# Altium PCB PCB.PcbDoc (part 4 of 4)
Units mil, origin at the board's own origin, x right, y up, seen from the top; angles counter-clockwise.
Board outline 2958.79 x 990.23 mil, 2 copper layers (Component Side, Bottom Layer), stack 63.78 mil thick; 63 components, 40 nets, 198 pads, 73 vias.
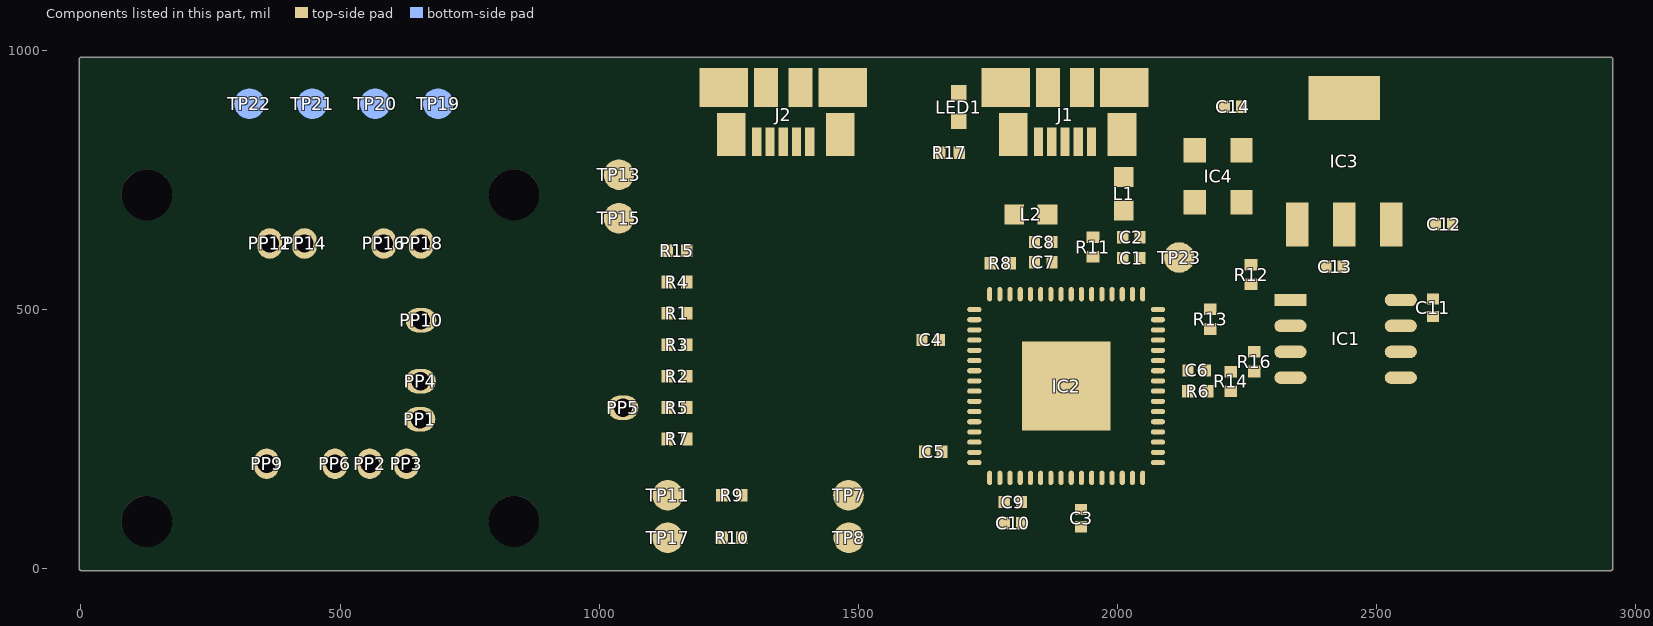
[diagram p4: the components of this part, seen from the top]

## Via types
v1: diameter 23.62, hole 9.84, Component Side to Bottom Layer, 73 vias

## Nets (pads, with @x,y where several pads share a name; then routed paths per layer and width w, separated by ;. In a path a pad name is that pad's centre, name@x,y a point inside that pad or via, vN(x,y) a via of type N, cw(c..) or ccw(c..) an arc to the next point about the centre after c; other vN are vias at no path point) (continued)
copper on no net: (continued)
  Component Side w0.3: 2876.75,760.69 2885.75,760.69 ; 2877.35,760.99 2885.15,760.99 ; 2877.65,761.29 2884.55,761.29 ; 2878.55,761.59 2883.95,761.59 ; 2879.45,761.89 2883.05,761.89 ; 2880.65,709.99 2885.15,709.99 ; 2880.65,710.29 2885.15,710.29 ; 2880.65,710.59 2885.15,710.59 ; 2880.65,710.89 2900.15,710.89 ; 2880.65,711.19 2900.15,711.19 ; 2880.65,711.49 2900.15,711.49 ; 2880.65,711.79 2900.15,711.79 ; 2880.65,712.09 2900.15,712.09 ; 2880.65,712.39 2899.85,712.39 ; 2880.65,712.69 2900.15,712.69 ; 2880.65,712.99 2900.15,712.99 ; 2880.65,713.29 2900.15,713.29 ; 2880.65,713.59 2900.15,713.59 ; 2880.65,713.89 2900.15,713.89 ; 2880.65,714.19 2900.15,714.19 ; 2880.65,714.49 2885.15,714.49 ; 2880.65,714.79 2885.15,714.79 ; 2880.95,708.19 2885.45,708.19 ; 2880.95,708.49 2885.45,708.49 ; 2880.95,708.79 2885.45,708.79 ; 2880.95,709.09 2885.45,709.09 ; 2880.95,709.39 2885.15,709.39 ; 2880.95,709.69 2885.15,709.69 ; 2880.95,715.09 2885.15,715.09 ; 2880.95,715.39 2885.15,715.39 ; 2880.95,715.69 2885.15,715.69 ; 2880.95,715.99 2885.45,715.99 ; 2880.95,716.29 2885.45,716.29 ; 2880.95,716.59 2885.45,716.59 ; 2880.95,757.39 2883.65,757.39 ; 2881.25,706.99 2886.05,706.99 ; 2881.25,707.29 2886.05,707.29 ; 2881.25,707.59 2885.75,707.59 ; 2881.25,707.89 2885.75,707.89 ; 2881.25,716.89 2885.45,716.89 ; 2881.25,717.19 2885.75,717.19 ; 2881.25,717.49 2885.75,717.49 ; 2881.25,717.79 2886.05,717.79 ; 2881.55,706.39 2886.65,706.39 ; 2881.55,706.69 2886.35,706.69 ; 2881.55,718.09 2886.05,718.09 ; 2881.55,718.39 2886.35,718.39 ; 2881.55,757.09 2883.35,757.09 ; 2881.85,705.79 2887.25,705.79 ; 2881.85,706.09 2886.95,706.09 ; 2881.85,718.69 2886.65,718.69 ; 2881.85,718.99 2886.95,718.99 ; 2882.15,705.19 2888.15,705.19 ; 2882.15,705.49 2887.55,705.49 ; 2882.15,719.29 2887.25,719.29 ; 2882.15,719.59 2887.85,719.59 ; 2882.15,756.79 2883.05,756.79 ; 2882.45,704.59 2898.95,704.59 ; 2882.45,704.89 2889.05,704.89 ; 2882.45,719.89 2888.45,719.89 ; 2882.45,720.19 2889.95,720.19 ; 2882.75,704.29 2899.25,704.29 ; 2882.75,720.49 2898.35,720.49 ; 2882.75,756.49 2883.05,756.49 ; 2883.05,703.69 2898.95,703.69 ; 2883.05,703.99 2899.25,703.99 ; 2883.05,720.79 2898.05,720.79 ; 2883.05,721.09 2897.75,721.09 ; 2883.35,703.39 2898.65,703.39 ; 2883.35,721.39 2897.45,721.39 ; 2883.65,703.09 2898.35,703.09 ; 2883.65,721.69 2897.15,721.69 ; 2883.95,702.79 2898.05,702.79 ; 2883.95,721.99 2896.85,721.99 ; 2884.25,702.49 2897.75,702.49 ; 2884.25,722.29 2896.55,722.29 ; 2884.55,722.59 2896.25,722.59 ; 2884.85,702.19 2897.15,702.19 ; 2884.85,722.89 2895.65,722.89 ; 2885.15,701.89 2896.85,701.89 ; 2885.45,723.19 2895.35,723.19 ; 2885.75,701.59 2896.25,701.59 ; 2885.75,749.89 2890.55,749.89 ; 2885.75,750.19 2890.55,750.19 ; 2886.05,723.49 2894.75,723.49 ; 2886.05,746.89 2890.85,746.89 ; 2886.05,747.19 2890.85,747.19 ; 2886.05,747.49 2890.85,747.49 ; 2886.05,747.79 2890.55,747.79 ; 2886.05,748.09 2890.55,748.09 ; 2886.05,748.39 2890.55,748.39 ; 2886.05,748.69 2890.55,748.69 ; 2886.05,748.99 2890.55,748.99 ; 2886.05,749.29 2890.55,749.29 ; 2886.05,749.59 2890.55,749.59 ; 2886.05,750.49 2890.55,750.49 ; 2886.05,750.79 2890.55,750.79 ; 2886.05,751.09 2890.55,751.09 ; 2886.05,751.39 2890.55,751.39 ; 2886.05,751.69 2890.55,751.69 ; 2886.05,751.99 2890.55,751.99 ; 2886.05,752.29 2890.55,752.29 ; 2886.05,752.59 2890.85,752.59 ; 2886.05,752.89 2890.85,752.89 ; 2886.05,753.19 2890.85,753.19 ; 2886.35,701.29 2895.65,701.29 ; 2886.35,745.69 2891.15,745.69 ; 2886.35,745.99 2891.15,745.99 ; 2886.35,746.29 2891.15,746.29 ; 2886.35,746.59 2890.85,746.59 ; 2886.35,753.49 2890.85,753.49 ; 2886.35,753.79 2891.15,753.79 ; 2886.35,754.09 2891.15,754.09 ; 2886.35,754.39 2891.15,754.39 ; 2886.65,723.79 2894.15,723.79 ; 2886.65,744.49 2892.05,744.49 ; 2886.65,744.79 2891.75,744.79 ; 2886.65,745.09 2891.45,745.09 ; 2886.65,745.39 2891.45,745.39 ; 2886.65,754.69 2891.45,754.69 ; 2886.65,754.99 2891.45,754.99 ; 2886.65,755.29 2891.75,755.29 ; 2886.95,700.99 2894.75,700.99 ; 2886.95,743.89 2892.65,743.89 ; 2886.95,744.19 2892.35,744.19 ; 2886.95,755.59 2892.05,755.59 ; 2886.95,755.89 2892.35,755.89 ; 2886.95,756.19 2892.65,756.19 ; 2887.25,743.29 2893.55,743.29 ; 2887.25,743.59 2892.95,743.59 ; 2887.25,756.49 2892.95,756.49 ; 2887.25,756.79 2893.55,756.79 ; 2887.55,724.09 2892.95,724.09 ; 2887.55,742.69 2895.05,742.69 ; 2887.55,742.99 2894.15,742.99 ; 2887.55,757.09 2894.15,757.09 ; 2887.55,757.39 2895.05,757.39 ; 2887.85,742.39 2904.35,742.39 ; 2887.85,757.69 2904.35,757.69 ; 2888.15,700.69 2893.85,700.69 ; 2888.15,742.09 2904.95,742.09 ; 2888.15,757.99 2904.95,757.99 ; 2888.45,741.49 2904.35,741.49 ; 2888.45,741.79 2904.65,741.79 ; 2888.45,758.29 2904.65,758.29 ; 2888.45,758.59 2904.35,758.59 ; 2888.75,741.19 2904.05,741.19 ; 2888.75,758.89 2904.05,758.89 ; 2889.05,724.39 2891.45,724.39 ; 2889.05,740.89 2903.75,740.89 ; 2889.05,759.19 2903.75,759.19 ; 2889.35,740.59 2903.45,740.59 ; 2889.35,759.49 2903.45,759.49 ; 2889.65,740.29 2903.15,740.29 ; 2889.65,759.79 2903.15,759.79 ; 2890.25,739.99 2902.85,739.99 ; 2890.25,760.09 2902.55,760.09 ; 2890.55,700.39 2891.45,700.39 ; 2890.55,720.19 2898.35,720.19 ; 2890.55,739.69 2902.25,739.69 ; 2890.55,760.39 2902.25,760.39 ; 2891.15,739.39 2901.65,739.39 ; 2891.15,760.69 2901.65,760.69 ; 2891.75,739.09 2901.35,739.09 ; 2891.75,760.99 2901.35,760.99 ; 2892.05,719.89 2898.65,719.89 ; 2892.35,738.79 2900.45,738.79 ; 2892.35,761.29 2900.45,761.29 ; 2892.65,704.89 2898.65,704.89 ; 2892.65,719.59 2898.65,719.59 ; 2893.25,719.29 2898.95,719.29 ; 2893.25,738.49 2899.85,738.49 ; 2893.25,761.59 2899.55,761.59 ; 2893.55,705.19 2898.05,705.19 ; 2893.55,718.99 2898.95,718.99 ; 2893.85,718.69 2899.25,718.69 ; 2894.15,705.49 2897.75,705.49 ; 2894.15,718.39 2899.25,718.39 ; 2894.15,738.19 2898.65,738.19 ; 2894.45,717.79 2899.55,717.79 ; 2894.45,718.09 2899.55,718.09 ; 2894.45,761.89 2898.65,761.89 ; 2894.75,705.79 2897.45,705.79 ; 2894.75,717.19 2899.55,717.19 ; 2894.75,717.49 2899.55,717.49 ; 2895.05,706.09 2897.15,706.09 ; 2895.05,716.29 2899.85,716.29 ; 2895.05,716.59 2899.85,716.59 ; 2895.05,716.89 2899.85,716.89 ; 2895.35,714.49 2899.85,714.49 ; 2895.35,714.79 2899.85,714.79 ; 2895.35,715.09 2899.85,715.09 ; 2895.35,715.39 2899.85,715.39 ; 2895.35,715.69 2899.85,715.69 ; 2895.35,715.99 2899.85,715.99 ; 2895.65,706.39 2896.85,706.39 ; 2895.95,706.69 2896.55,706.69 ; 2898.05,742.69 2904.05,742.69 ; 2898.05,757.39 2904.05,757.39 ; 2898.95,742.99 2903.75,742.99 ; 2898.95,757.09 2903.75,757.09 ; 2899.55,743.29 2903.45,743.29 ; 2899.55,756.79 2903.45,756.79 ; 2900.15,743.59 2903.15,743.59 ; 2900.15,756.49 2903.15,756.49 ; 2900.45,743.89 2902.85,743.89 ; 2900.45,756.19 2902.85,756.19 ; 2900.75,744.19 2902.55,744.19 ; 2900.75,755.89 2902.55,755.89 ; 2901.05,744.49 2902.25,744.49 ; 2901.05,755.59 2902.25,755.59 ; 2901.35,744.79 2901.95,744.79 ; 2901.35,755.29 2901.95,755.29 ; 2906.45,748.09 2910.95,748.09 ; 2906.45,748.39 2925.95,748.39 ; 2906.45,748.69 2925.95,748.69 ; 2906.45,748.99 2925.95,748.99 ; 2906.45,749.29 2925.95,749.29 ; 2906.45,749.59 2925.95,749.59 ; 2906.45,749.89 2925.95,749.89 ; 2906.45,750.19 2925.95,750.19 ; 2906.45,750.49 2925.95,750.49 ; 2906.45,750.79 2925.95,750.79 ; 2906.45,751.09 2925.95,751.09 ; 2906.45,751.39 2925.95,751.39 ; 2906.45,751.69 2925.95,751.69 ; 2906.45,751.99 2925.95,751.99 ; 2906.75,745.99 2911.25,745.99 ; 2906.75,746.29 2911.25,746.29 ; 2906.75,746.59 2911.25,746.59 ; 2906.75,746.89 2911.25,746.89 ; 2906.75,747.19 2910.95,747.19 ; 2906.75,747.49 2910.95,747.49 ; 2906.75,747.79 2910.95,747.79 ; 2906.75,752.29 2910.95,752.29 ; 2906.75,752.59 2910.95,752.59 ; 2906.75,752.89 2910.95,752.89 ; 2906.75,753.19 2911.25,753.19 ; 2906.75,753.49 2911.25,753.49 ; 2906.75,753.79 2911.25,753.79 ; 2907.05,744.79 2911.85,744.79 ; 2907.05,745.09 2911.85,745.09 ; 2907.05,745.39 2911.55,745.39 ; 2907.05,745.69 2911.55,745.69 ; 2907.05,754.09 2911.25,754.09 ; 2907.05,754.39 2911.25,754.39 ; 2907.05,754.69 2911.55,754.69 ; 2907.05,754.99 2911.55,754.99 ; 2907.35,743.89 2912.45,743.89 ; 2907.35,744.19 2912.15,744.19 ; 2907.35,744.49 2912.15,744.49 ; 2907.35,755.29 2911.85,755.29 ; 2907.35,755.59 2911.85,755.59 ; 2907.35,755.89 2912.15,755.89 ; 2907.65,743.29 2913.35,743.29 ; 2907.65,743.59 2912.75,743.59 ; 2907.65,756.19 2912.45,756.19 ; 2907.65,756.49 2912.75,756.49 ; 2907.95,742.69 2914.25,742.69 ; 2907.95,742.99 2913.65,742.99 ; 2907.95,756.79 2913.05,756.79 ; 2907.95,757.09 2913.35,757.09 ; 2907.95,757.39 2913.95,757.39 ; 2908.25,742.09 2924.75,742.09 ; 2908.25,742.39 2915.45,742.39 ; 2908.25,757.69 2914.85,757.69 ; 2908.55,741.79 2925.35,741.79 ; 2908.55,757.99 2924.15,757.99 ; 2908.55,758.29 2923.85,758.29 ; 2908.85,741.49 2925.05,741.49 ; 2908.85,758.59 2923.55,758.59 ; 2909.15,741.19 2924.75,741.19 ; 2909.15,758.89 2923.25,758.89 ; 2909.45,740.89 2924.45,740.89 ; 2909.45,759.19 2923.25,759.19 ; 2909.45,759.49 2922.95,759.49 ; 2909.75,740.29 2923.85,740.29 ; 2909.75,740.59 2924.15,740.59 ; 2910.05,759.79 2922.35,759.79 ; 2910.35,739.99 2923.55,739.99 ; 2910.35,760.09 2922.05,760.09 ; 2910.65,739.69 2922.95,739.69 ; 2910.65,760.39 2921.75,760.39 ; 2910.95,760.69 2921.15,760.69 ; 2911.25,739.39 2922.35,739.39 ; 2911.55,760.99 2920.55,760.99 ; 2911.85,739.09 2921.75,739.09 ; 2912.15,761.29 2919.95,761.29 ; 2912.45,738.79 2921.15,738.79 ; 2913.05,738.49 2920.25,738.49 ; 2913.05,761.59 2919.35,761.59 ; 2914.25,761.89 2918.15,761.89 ; 2914.55,738.19 2919.35,738.19 ; 2917.25,757.69 2924.45,757.69 ; 2918.15,742.39 2924.45,742.39 ; 2918.15,757.39 2924.45,757.39 ; 2918.75,757.09 2924.75,757.09 ; 2919.05,742.69 2924.15,742.69 ; 2919.35,756.79 2924.75,756.79 ; 2919.65,756.49 2925.05,756.49 ; 2919.95,742.99 2923.85,742.99 ; 2919.95,755.89 2925.05,755.89 ; 2919.95,756.19 2925.05,756.19 ; 2920.25,743.29 2923.55,743.29 ; 2920.25,755.59 2925.35,755.59 ; 2920.55,754.99 2925.35,754.99 ; 2920.55,755.29 2925.35,755.29 ; 2920.85,743.59 2922.95,743.59 ; 2920.85,754.09 2925.65,754.09 ; 2920.85,754.39 2925.65,754.39 ; 2920.85,754.69 2925.65,754.69 ; 2921.15,743.89 2922.65,743.89 ; 2921.15,752.29 2925.95,752.29 ; 2921.15,752.59 2925.65,752.59 ; 2921.15,752.89 2925.65,752.89 ; 2921.15,753.19 2925.65,753.19 ; 2921.15,753.49 2925.65,753.49 ; 2921.15,753.79 2925.65,753.79 ; 2921.75,744.19 2922.35,744.19

## Polygon pours and split planes (outlines as drawn)
no net on Component Side "AntmicroLogo" (solid, pour order 88): 319 vertices, not listed, extent 2275.49,102.59 2424.17,272.9
no net on Component Side "AntmicroLogo" (solid, pour order 90): 205 vertices, not listed, extent -1464.66,152.87 2377,1380.33
no net on Component Side "AntmicroLogoA" (solid, pour order 92): 2444.34,166.67 2442.81,174.44 2443.46,179.41 2445.31,183.61 2448.28,187.11 2452.25,189.96 2457.12,192.22 2462.78,193.97 2469.13,195.25 2476.06,196.13 2476.06,199.76 2475.85,202.61 2475.24,205.04 2474.23,207.07 2472.82,208.71 2471.03,209.96 2468.86,210.85 2466.31,211.37 2463.4,211.54 2455.55,210.49 2448.54,207.8 2446.22,213.74 2454.71,216.84 2464.28,218.03 2472.97,216.88 2479.52,213.36 2483.65,207.36 2485.09,198.77 2485.09,160.68 2476.43,157.64 2465.38,156.49 2455.86,157.64 2448.77,161.05
no net on Component Side "AntmicroLogoC" (solid, pour order 102): 2695.16,169.59 2693.23,174.85 2692.05,180.79 2691.65,187.33 2692.06,193.86 2693.25,199.79 2695.19,205.02 2697.83,209.49 2701.14,213.11 2705.07,215.79 2709.6,217.46 2714.66,218.03 2722.19,217.02 2727.98,214.19 2725.67,208.46 2723.73,209.67 2721.45,210.61 2718.93,211.22 2716.31,211.44 2710.01,209.63 2705.39,204.61 2702.54,197.03 2701.57,187.54 2702.55,178.13 2705.43,170.5 2710.06,165.4 2716.31,163.54 2718.92,163.74 2721.39,164.31 2723.63,165.21 2725.56,166.4 2727.99,160.35 2722.19,157.51 2714.66,156.49 2709.57,157.08 2705.03,158.76 2701.09,161.46 2697.79,165.1
no net on Component Side "AntmicroLogoN" (solid, pour order 94): 2507.79,157.61 2507.79,209.89 2512.66,211.38 2518.26,211.88 2524.43,211.05 2528.55,208.56 2530.86,204.4 2531.58,198.56 2531.58,157.61 2541.27,157.61 2541.27,198.56 2539.92,206.89 2535.75,213 2528.58,216.76 2518.26,218.03 2507.48,216.89 2498.11,213.86 2498.11,157.61
no net on Component Side "AntmicroLogoR" (solid, pour order 104): 2737.33,157.61 2737.33,213.86 2746.18,216.89 2757.58,218.03 2760.79,217.92 2762.76,217.71 2760.56,210.44 2757.7,211.19 2754.51,211.44 2750.55,211.08 2747.02,209.89 2747.02,157.61
no net on Component Side "AntmicroLogoO" (solid, pour order 106): 2767.32,169.73 2769.84,165.22 2773.1,161.55 2777.15,158.8 2781.97,157.09 2787.59,156.49 2793.21,157.09 2798.04,158.8 2802.07,161.55 2805.34,165.22 2807.86,169.73 2809.64,174.98 2810.69,180.88 2811.04,187.33 2810.7,193.73 2809.64,199.6 2807.86,204.83 2805.34,209.33 2802.08,212.99 2798.04,215.73 2793.21,217.44 2787.59,218.03 2781.97,217.44 2777.15,215.73 2773.1,212.99 2769.84,209.33 2767.32,204.83 2765.55,199.6 2764.49,193.73 2764.14,187.33 2764.49,180.88 2765.55,174.98
no net on Component Side "AntmicroLogoT" (solid, pour order 96): 2558.52,160.86 2555.62,165.55 2554.6,172.02 2554.6,210.88 2547.77,210.88 2547.77,216.94 2554.6,216.94 2554.6,230.58 2564.28,233.56 2564.28,216.94 2574.63,216.94 2574.63,210.88 2564.28,210.88 2564.28,172.02 2564.75,168.55 2566.15,165.96 2568.46,164.33 2571.66,163.77 2574.63,164.21 2574.63,158.04 2572,157.3 2568.79,157.05 2563,158.01
no net on Component Side "AntmicroLogoI" (solid, pour order 100): 2672.95,157.61 2682.64,157.61 2682.64,216.94 2672.95,216.94
no net on Component Side "AntmicroLogoM" (solid, pour order 98): 2593.23,157.52 ccw(c2593.23,157.61) 2593.32,157.61 2593.32,209.82 2598.35,211.34 2604.35,211.79 2607.4,211.59 2609.99,210.98 2612.14,210.01 2613.86,208.7 2615.17,207.08 2616.09,205.16 2616.62,202.97 2616.8,200.53 2616.8,200.52 2616.8,200.53 2616.8,157.61 ccw(c2616.89,157.61) 2616.89,157.52 2626.48,157.52 ccw(c2626.48,157.61) 2626.57,157.61 2626.57,206.22 2628.86,208.51 2631.55,210.27 2634.61,211.4 2638.04,211.79 2641.04,211.56 2643.58,210.88 2645.67,209.79 2647.34,208.31 2648.6,206.46 2649.48,204.28 2650,201.78 2650.17,198.99 2650.17,198.98 2650.17,198.99 2650.17,157.6 ccw(c2650.26,157.6) 2650.26,157.51 2659.83,157.51 ccw(c2659.83,157.6) 2659.92,157.6 2659.92,198.88 ccw(c2659.83,198.88) 2659.92,198.89 2658.69,206.67 ccw(c2658.61,206.66) 2658.68,206.71 ccw(c2658.61,206.66) 2658.68,206.71 2654.9,212.76 ccw(c2654.82,212.71) 2654.9,212.76 ccw(c2654.82,212.71) 2654.87,212.79 ccw(c2654.82,212.71) 2654.87,212.79 2648.36,216.71 cw(c2648.32,216.64) 2648.36,216.71 ccw(c2648.32,216.64) 2648.33,216.73 2638.93,218.12 ccw(c2638.92,218.03) 2638.91,218.12 ccw(c2638.92,218.03) 2638.91,218.12 2633.83,217.64 2633.82,217.64 cw(c2633.83,217.56) 2633.83,217.64 2633.82,217.64 ccw(c2633.83,217.56) 2633.81,217.64 2629.2,216.27 ccw(c2629.23,216.18) 2629.18,216.26 2625.15,214.08 ccw(c2625.2,214) 2625.14,214.07 ccw(c2625.2,214) 2625.14,214.07 2621.86,211.23 2618.75,214.16 cw(c2618.69,214.09) 2618.75,214.16 ccw(c2618.69,214.09) 2618.73,214.17 ccw(c2618.69,214.09) 2618.73,214.17 cw(c2618.69,214.09) 2618.75,214.16 2618.73,214.17 2614.87,216.34 ccw(c2614.83,216.26) 2614.87,216.34 ccw(c2614.83,216.26) 2614.85,216.35 2610.05,217.67 ccw(c2610.02,217.59) 2610.03,217.68 ccw(c2610.02,217.59) 2610.03,217.68 2604.02,218.12 cw(c2604.02,218.03) 2604.02,218.12 ccw(c2604.02,218.03) 2604.01,218.12 2592.96,216.98 ccw(c2592.97,216.89) 2592.94,216.98 2583.62,213.94 ccw(c2583.65,213.86) 2583.56,213.86 2583.56,157.61 ccw(c2583.65,157.61) 2583.65,157.52 2593.23,157.52 cw(c-1197.01,1365)
no net on Top Solder "AntmicroLogoR" (solid, pour order 63): 2737.33,157.61 2737.33,213.86 2746.18,216.89 2757.58,218.03 2760.79,217.92 2762.76,217.71 2760.56,210.44 2757.7,211.19 2754.51,211.44 2750.55,211.08 2747.02,209.89 2747.02,157.61
no net on Top Solder "AntmicroLogoO" (solid, pour order 64): 2767.32,169.73 2769.84,165.22 2773.1,161.55 2777.15,158.8 2781.97,157.09 2787.59,156.49 2793.21,157.09 2798.04,158.8 2802.07,161.55 2805.34,165.22 2807.86,169.73 2809.64,174.98 2810.69,180.88 2811.04,187.33 2810.7,193.73 2809.64,199.6 2807.86,204.83 2805.34,209.33 2802.08,212.99 2798.04,215.73 2793.21,217.44 2787.59,218.03 2781.97,217.44 2777.15,215.73 2773.1,212.99 2769.84,209.33 2767.32,204.83 2765.55,199.6 2764.49,193.73 2764.14,187.33 2764.49,180.88 2765.55,174.98
no net on Top Solder "AntmicroLogoN" (solid, pour order 58): 2507.79,157.61 2507.79,209.89 2512.66,211.38 2518.26,211.88 2524.43,211.05 2528.55,208.56 2530.86,204.4 2531.58,198.56 2531.58,157.61 2541.27,157.61 2541.27,198.56 2539.92,206.89 2535.75,213 2528.58,216.76 2518.26,218.03 2507.48,216.89 2498.11,213.86 2498.11,157.61
no net on Top Solder "AntmicroLogoM" (solid, pour order 60): 2593.23,157.52 ccw(c2593.23,157.61) 2593.32,157.61 2593.32,209.82 2598.35,211.34 2604.35,211.79 2607.4,211.59 2609.99,210.98 2612.14,210.01 2613.86,208.7 2615.17,207.08 2616.09,205.16 2616.62,202.97 2616.8,200.53 2616.8,200.52 2616.8,200.53 2616.8,157.61 ccw(c2616.89,157.61) 2616.89,157.52 2626.48,157.52 ccw(c2626.48,157.61) 2626.57,157.61 2626.57,206.22 2628.86,208.51 2631.55,210.27 2634.61,211.4 2638.04,211.79 2641.04,211.56 2643.58,210.88 2645.67,209.79 2647.34,208.31 2648.6,206.46 2649.48,204.28 2650,201.78 2650.17,198.99 2650.17,198.98 2650.17,198.99 2650.17,157.6 ccw(c2650.26,157.6) 2650.26,157.51 2659.83,157.51 ccw(c2659.83,157.6) 2659.92,157.6 2659.92,198.88 ccw(c2659.83,198.88) 2659.92,198.89 2658.69,206.67 ccw(c2658.61,206.66) 2658.68,206.71 ccw(c2658.61,206.66) 2658.68,206.71 2654.9,212.76 ccw(c2654.82,212.71) 2654.9,212.76 ccw(c2654.82,212.71) 2654.87,212.79 ccw(c2654.82,212.71) 2654.87,212.79 2648.36,216.71 cw(c2648.32,216.64) 2648.36,216.71 ccw(c2648.32,216.64) 2648.33,216.73 2638.93,218.12 ccw(c2638.92,218.03) 2638.91,218.12 ccw(c2638.92,218.03) 2638.91,218.12 2633.83,217.64 2633.82,217.64 cw(c2633.83,217.56) 2633.83,217.64 2633.82,217.64 ccw(c2633.83,217.56) 2633.81,217.64 2629.2,216.27 ccw(c2629.23,216.18) 2629.18,216.26 2625.15,214.08 ccw(c2625.2,214) 2625.14,214.07 ccw(c2625.2,214) 2625.14,214.07 2621.86,211.23 2618.75,214.16 cw(c2618.69,214.09) 2618.75,214.16 ccw(c2618.69,214.09) 2618.73,214.17 ccw(c2618.69,214.09) 2618.73,214.17 cw(c2618.69,214.09) 2618.75,214.16 2618.73,214.17 2614.87,216.34 ccw(c2614.83,216.26) 2614.87,216.34 ccw(c2614.83,216.26) 2614.85,216.35 2610.05,217.67 ccw(c2610.02,217.59) 2610.03,217.68 ccw(c2610.02,217.59) 2610.03,217.68 2604.02,218.12 cw(c2604.02,218.03) 2604.02,218.12 ccw(c2604.02,218.03) 2604.01,218.12 2592.96,216.98 ccw(c2592.97,216.89) 2592.94,216.98 2583.62,213.94 ccw(c2583.65,213.86) 2583.56,213.86 2583.56,157.61 ccw(c2583.65,157.61) 2583.65,157.52 2593.23,157.52 cw(c-1197.01,1365)
no net on Top Solder "AntmicroLogoI" (solid, pour order 61): 2672.95,157.61 2682.64,157.61 2682.64,216.94 2672.95,216.94
no net on Top Solder "AntmicroLogoC" (solid, pour order 62): 2695.16,169.59 2693.23,174.85 2692.05,180.79 2691.65,187.33 2692.06,193.86 2693.25,199.79 2695.19,205.02 2697.83,209.49 2701.14,213.11 2705.07,215.79 2709.6,217.46 2714.66,218.03 2722.19,217.02 2727.98,214.19 2725.67,208.46 2723.73,209.67 2721.45,210.61 2718.93,211.22 2716.31,211.44 2710.01,209.63 2705.39,204.61 2702.54,197.03 2701.57,187.54 2702.55,178.13 2705.43,170.5 2710.06,165.4 2716.31,163.54 2718.92,163.74 2721.39,164.31 2723.63,165.21 2725.56,166.4 2727.99,160.35 2722.19,157.51 2714.66,156.49 2709.57,157.08 2705.03,158.76 2701.09,161.46 2697.79,165.1
no net on Top Solder "AntmicroLogoA" (solid, pour order 59): 2444.34,166.67 2442.81,174.44 2443.46,179.41 2445.31,183.61 2448.28,187.11 2452.25,189.96 2457.12,192.22 2462.78,193.97 2469.13,195.25 2476.06,196.13 2476.06,199.76 2475.85,202.61 2475.24,205.04 2474.23,207.07 2472.82,208.71 2471.03,209.96 2468.86,210.85 2466.31,211.37 2463.4,211.54 2455.55,210.49 2448.54,207.8 2446.22,213.74 2454.71,216.84 2464.28,218.03 2472.97,216.88 2479.52,213.36 2483.65,207.36 2485.09,198.77 2485.09,160.68 2476.43,157.64 2465.38,156.49 2455.86,157.64 2448.77,161.05
no net on Top Solder "AntmicroLogo" (solid, pour order 55): 319 vertices, not listed, extent 2275.49,102.59 2424.17,272.9
no net on Top Solder "AntmicroLogo" (solid, pour order 56): 205 vertices, not listed, extent -1464.66,152.87 2377,1380.33
no net on Top Solder "AntmicroLogoT" (solid, pour order 59): 2558.52,160.86 2555.62,165.55 2554.6,172.02 2554.6,210.88 2547.77,210.88 2547.77,216.94 2554.6,216.94 2554.6,230.58 2564.28,233.56 2564.28,216.94 2574.63,216.94 2574.63,210.88 2564.28,210.88 2564.28,172.02 2564.75,168.55 2566.15,165.96 2568.46,164.33 2571.66,163.77 2574.63,164.21 2574.63,158.04 2572,157.3 2568.79,157.05 2563,158.01
GND on Bottom Layer "Bottom Layer-No Net" (solid, pour order 24): -3.21,984.25 -3.21,0.54 2949,0.54 2948.93,0.54 2948.93,984.25

## Keep-outs
Keep-Out Layer:
  lines w5.91: 0,5 0,984.25 2952.76,984.25 2952.76,0
  lines w6: 0,25 0,0 27.25,0 ; 5,0 2952.76,0

## Other copper
Component Side:
  pour cut-out: 2775.45,173.97 2774.52,178.13 2773.99,182.7 2773.83,187.54 2773.99,192.38 2774.52,196.92 2775.45,201.05 2776.83,204.67 2778.69,207.67 2781.08,209.94 2784.03,211.38 2787.59,211.88 2791.15,211.38 2794.11,209.94 2796.5,207.67 2798.36,204.67 2799.73,201.05 2800.66,196.92 2801.19,192.38 2801.35,187.54 2801.19,182.7 2800.66,178.13 2799.73,173.97 2798.36,170.31 2796.5,167.28 2794.11,164.98 2791.15,163.51 2787.59,163 2784.03,163.51 2781.08,164.98 2778.69,167.28 2776.83,170.31
  pour cut-out: 2452.98,169.31 2452.06,174.67 2453.69,181.39 2458.4,186.13 2465.95,189.24 2476.06,191.07 2476.06,164.1 2474.08,163.28 2471.7,162.66 2469.05,162.26 2466.26,162.12 2460.14,162.95 2455.69,165.37
  pour cut-out: 2366.82,168.04 ccw(c2369.17,168.04) 2369.17,165.69 ccw(c2369.17,168.04) 2371.52,168.04 ccw(c2369.17,168.04) 2369.17,170.4 ccw(c2369.17,168.04)
  pour cut-out: 2349.83,155.12 cw(c2349.83,159.73) 2345.22,159.73 cw(c2349.83,159.73) 2349.83,164.34 cw(c2349.83,159.73) 2354.44,159.73 cw(c2349.83,159.73)
  pour cut-out: 2330.48,165.69 cw(c2330.48,168.04) 2328.13,168.04 cw(c2330.48,168.04) 2330.48,170.4 cw(c2330.48,168.04) 2332.83,168.04 cw(c2330.48,168.04)
  pour cut-out: 2327.55,185.39 cw(c2327.55,187.75) 2325.19,187.75 cw(c2327.55,187.75) 2327.55,190.11 cw(c2327.55,187.75) 2329.9,187.75 cw(c2327.55,187.75)
  pour cut-out: 2330.48,205.1 cw(c2330.48,207.45) 2328.13,207.45 cw(c2330.48,207.45) 2330.48,209.81 cw(c2330.48,207.45) 2332.83,207.45 cw(c2330.48,207.45)
  pour cut-out: 2349.83,211.16 cw(c2349.83,215.77) 2345.22,215.77 cw(c2349.83,215.77) 2349.83,220.38 cw(c2349.83,215.77) 2354.44,215.77 cw(c2349.83,215.77)
  pour cut-out: 2369.17,205.1 cw(c2369.17,207.45) 2366.82,207.45 cw(c2369.17,207.45) 2369.17,209.81 cw(c2369.17,207.45) 2371.52,207.45 cw(c2369.17,207.45)
  pour cut-out: 2372.1,185.39 cw(c2372.1,187.75) 2369.74,187.75 cw(c2372.1,187.75) 2372.1,190.11 cw(c2372.1,187.75) 2374.45,187.75 cw(c2372.1,187.75)
  text "Fomu Programmer" at 2450,93.41 h52.23
  text "Rev. 1.1   06/2019" at 2450,41 h52.23

## Silkscreen, mask and mechanical layers (free items; w line width, h text height)
Top Overlay:
  text "Testbed" at 371,391 h30
Top Solder:
  drawing of 3327 lines, arcs and shapes, not listed
  text "Fomu Programmer" at 2450,93.41 h52.23
  text "Rev. 1.1   06/2019" at 2450,41 h52.23
Mechanical 2:
  drawing of 2176 lines, arcs and shapes, not listed
  text "Layer" at 3318,742 h60
  text "Name" at 3727.91,742 h60
  text "Material" at 4667.65,742 h60
  text "Thickness" at 5527.42,742 h60
  text "Constant" at 6177.26,742 h60
  text "Board Layer Stack" at 6747.12,742 h60
  text "1" at 3318,622 h60
  text "Top Paste" at 3727.91,622 h60
  text "2" at 3318,502 h60
  text "Top Overlay" at 3727.91,502 h60
  text "3" at 3318,382 h60
  text "Top Solder" at 3727.91,382 h60
  text "Solder Resist" at 4667.65,382 h60
  text "0.010mm" at 5527.42,382 h60
  text "3.5" at 6177.26,382 h60
  text "4" at 3318,262 h60
  text "Component Side" at 3727.91,262 h60
  text "Copper" at 4667.65,262 h60
  text "0.035mm" at 5527.42,262 h60
  text "5" at 3318,142 h60
  text "Dielectric 1" at 3727.91,142 h60
  text "FR-4" at 4667.65,142 h60
  text "1.550mm" at 5527.42,142 h60
  text "4.2" at 6177.26,142 h60
  text "6" at 3318,22 h60
  text "Bottom Layer" at 3727.91,22 h60
  text "Copper" at 4667.65,22 h60
  text "0.035mm" at 5527.42,22 h60
  text "7" at 3318,-98 h60
  text "Solder Side" at 3727.91,-98 h60
  text "Solder Resist" at 4667.65,-98 h60
  text "0.010mm" at 5527.42,-98 h60
  text "3.5" at 6177.26,-98 h60
  text "8" at 3318,-218 h60
  text "Bottom Overlay" at 3727.91,-218 h60
  text "9" at 3318,-338 h60
  text "Bottom Paste" at 3727.91,-338 h60
  text "PCB stackup offered by Eurocircuits" at 3254,-492 h60
  text "Technology class 8C" at 3250,-616 h60